# Altium PCB TeenAstro_ZH-1_2022-06-06.pcbdoc (part 1 of 2)
Units mm, origin at the board's own origin, x right, y up, seen from the top; angles counter-clockwise.
Board outline 53 x 62 mm, 4 copper layers (Top Layer, Mid-Layer 1, Mid-Layer 2, Bottom Layer); 108 components, 116 nets, 365 pads, 202 vias.
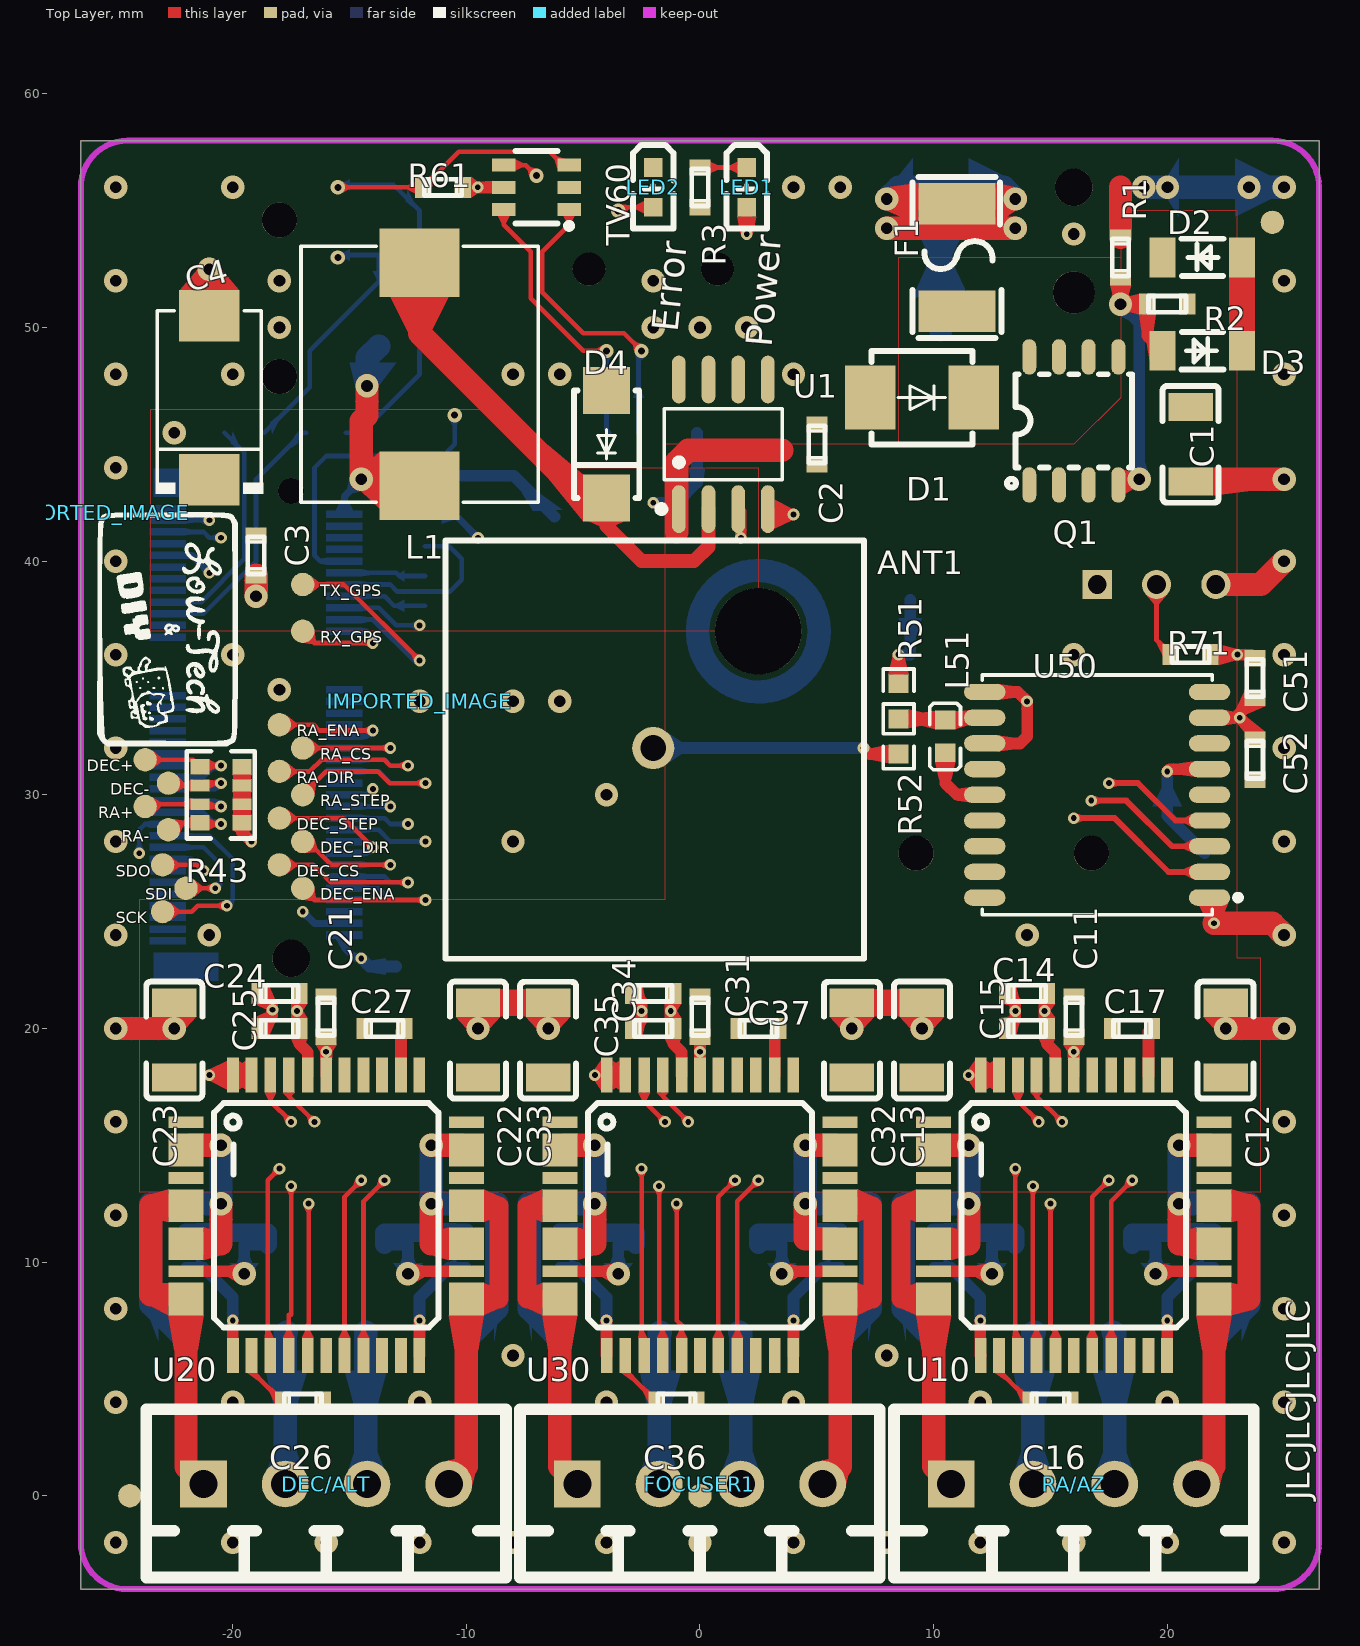
[diagram p0: Top Layer view]
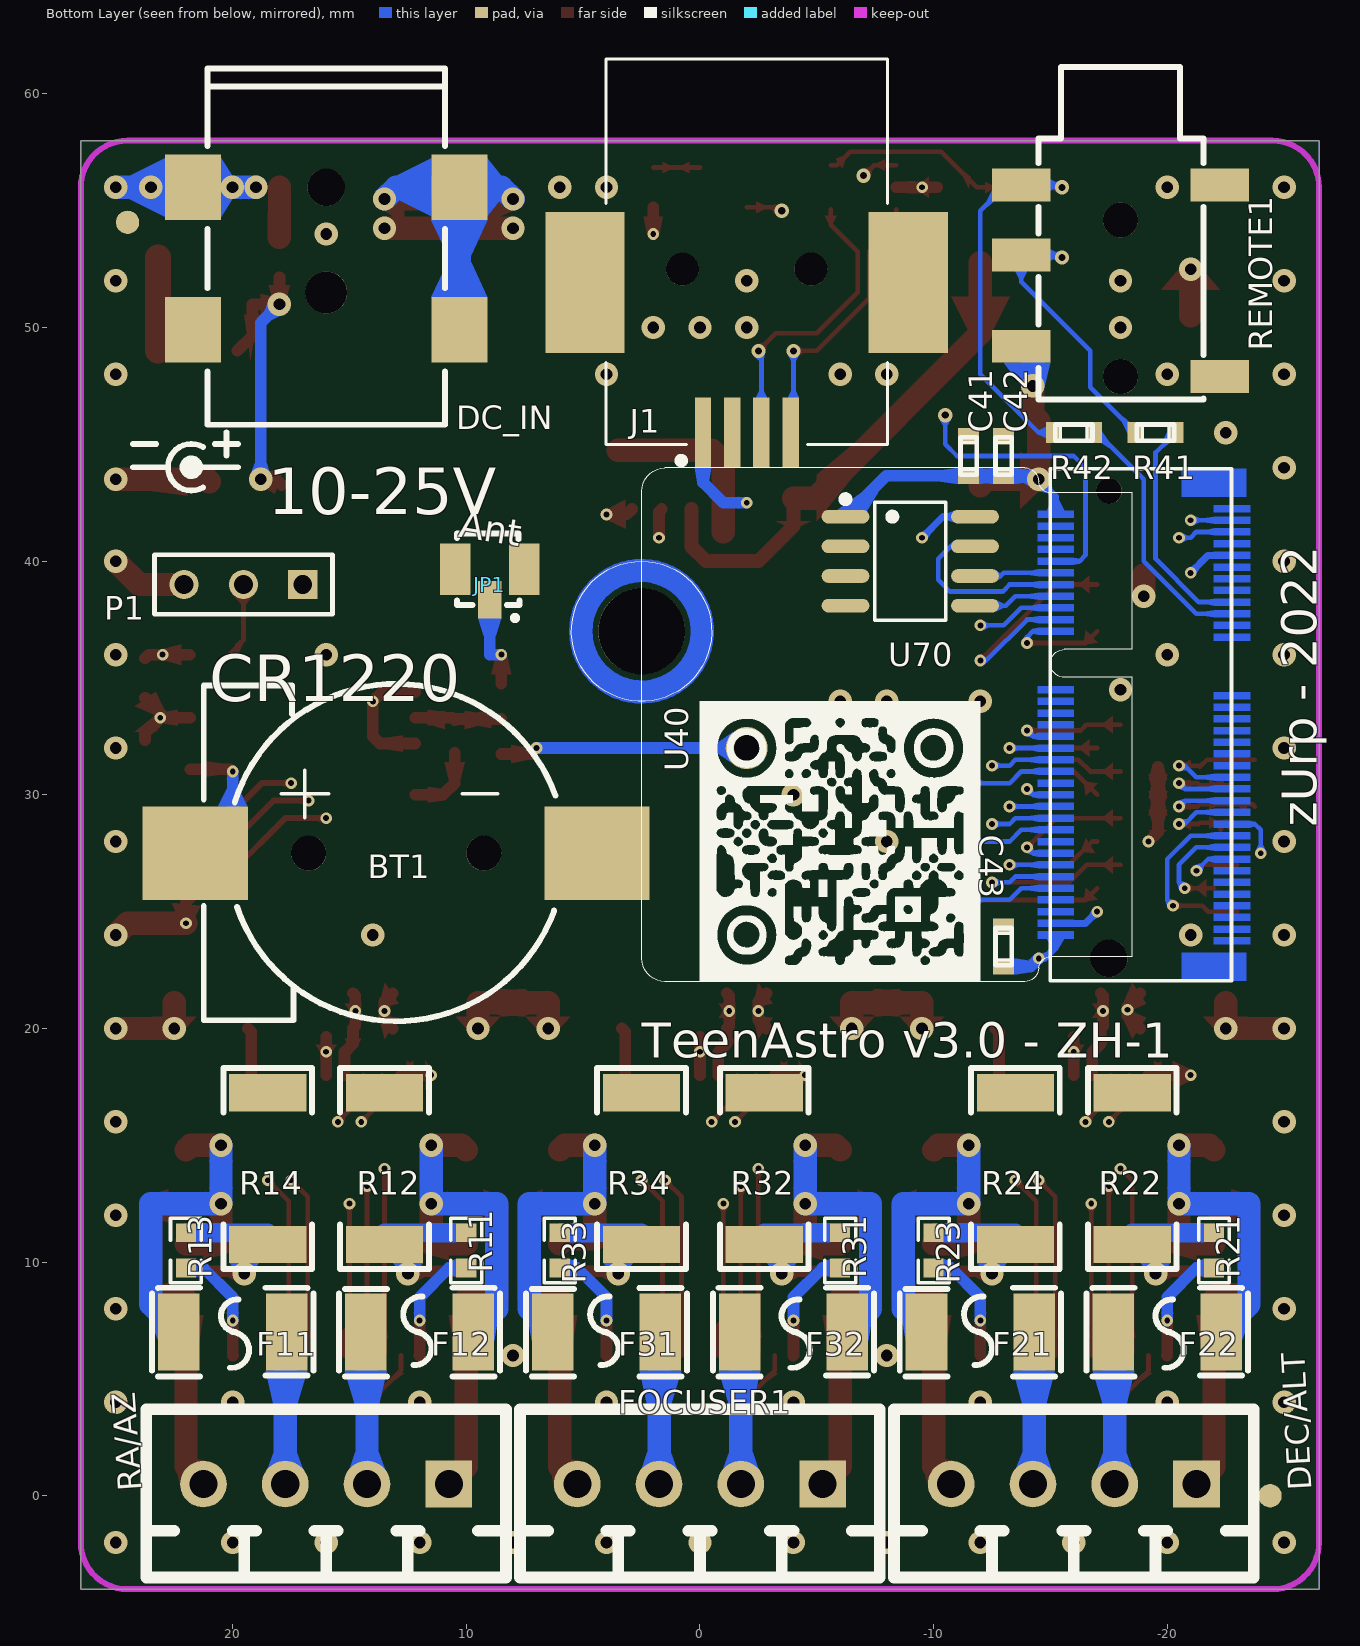
[diagram p1: Bottom Layer view, seen from below]
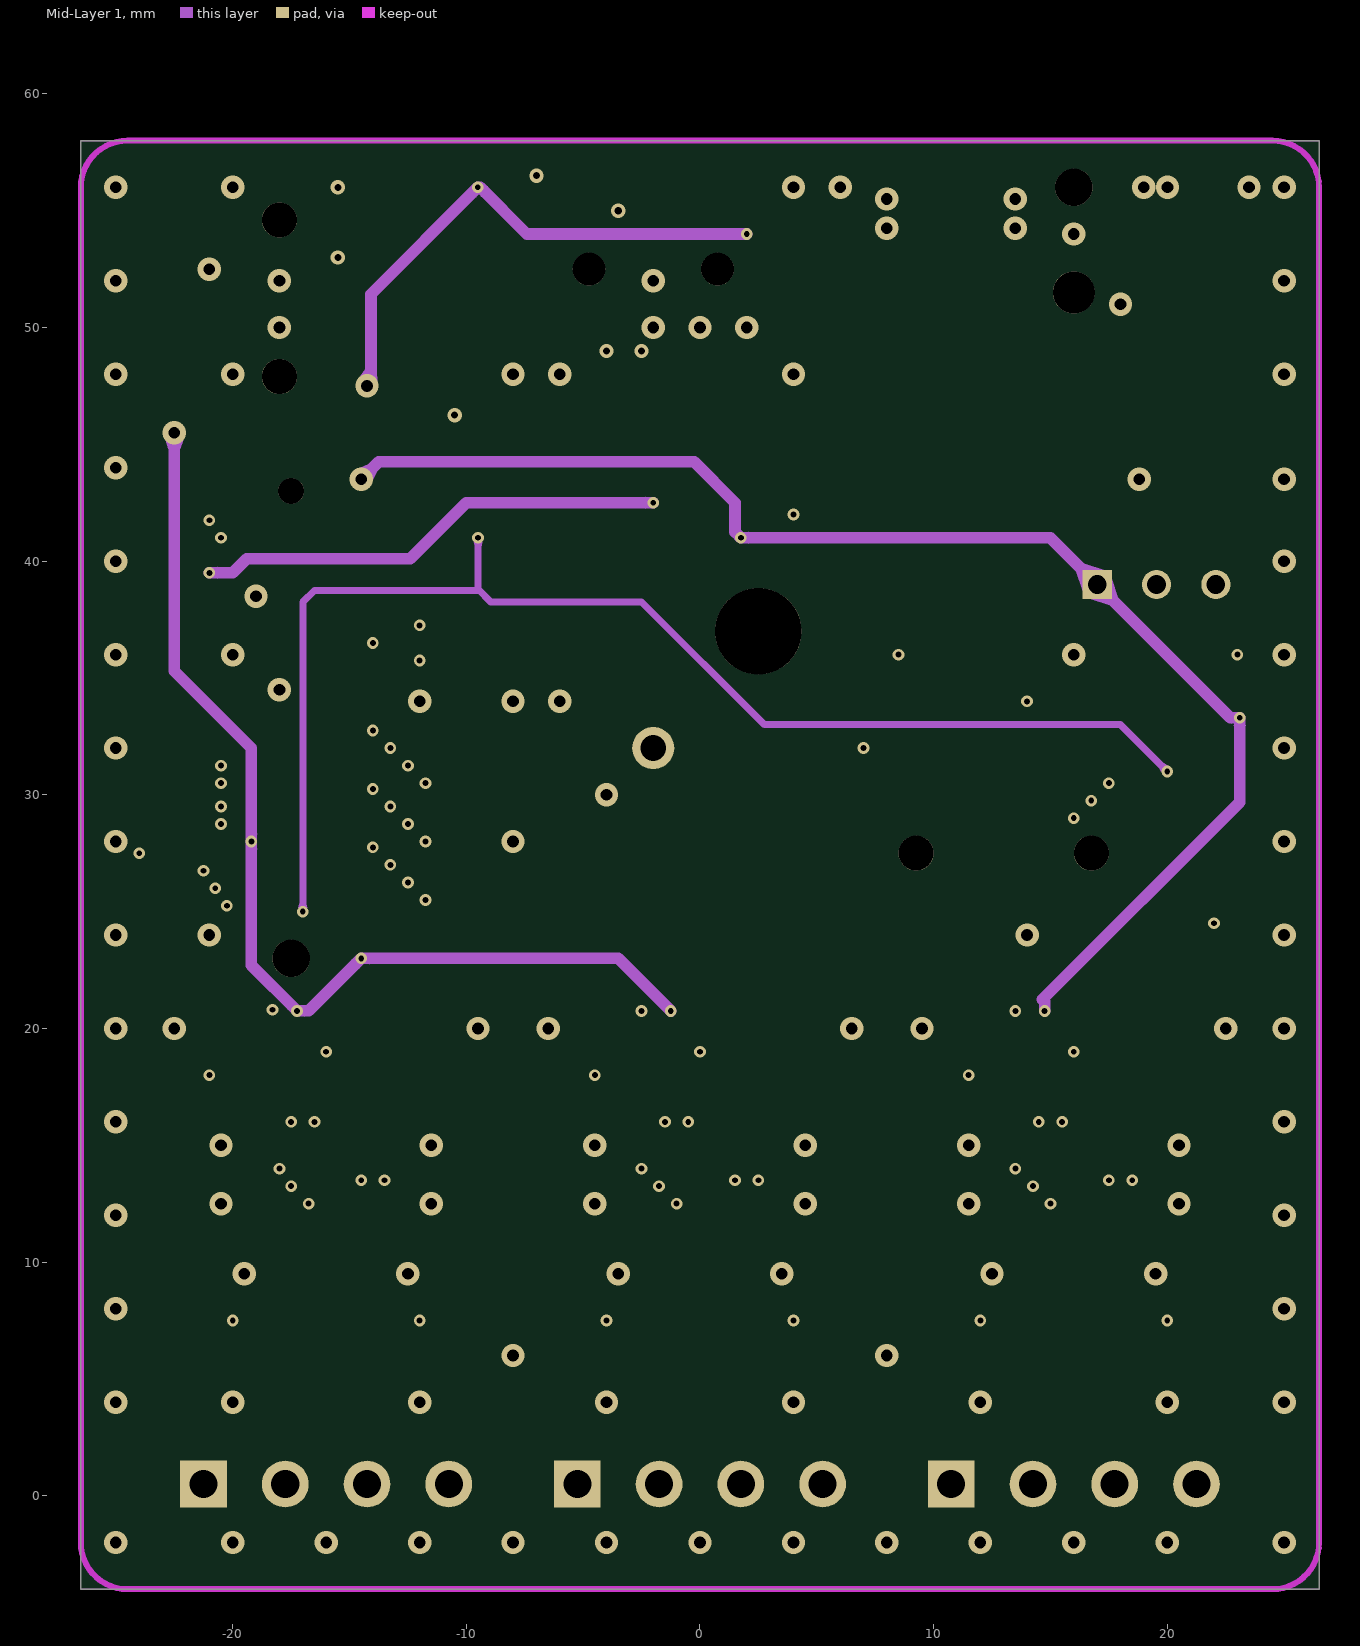
[diagram p2: Mid-Layer 1]
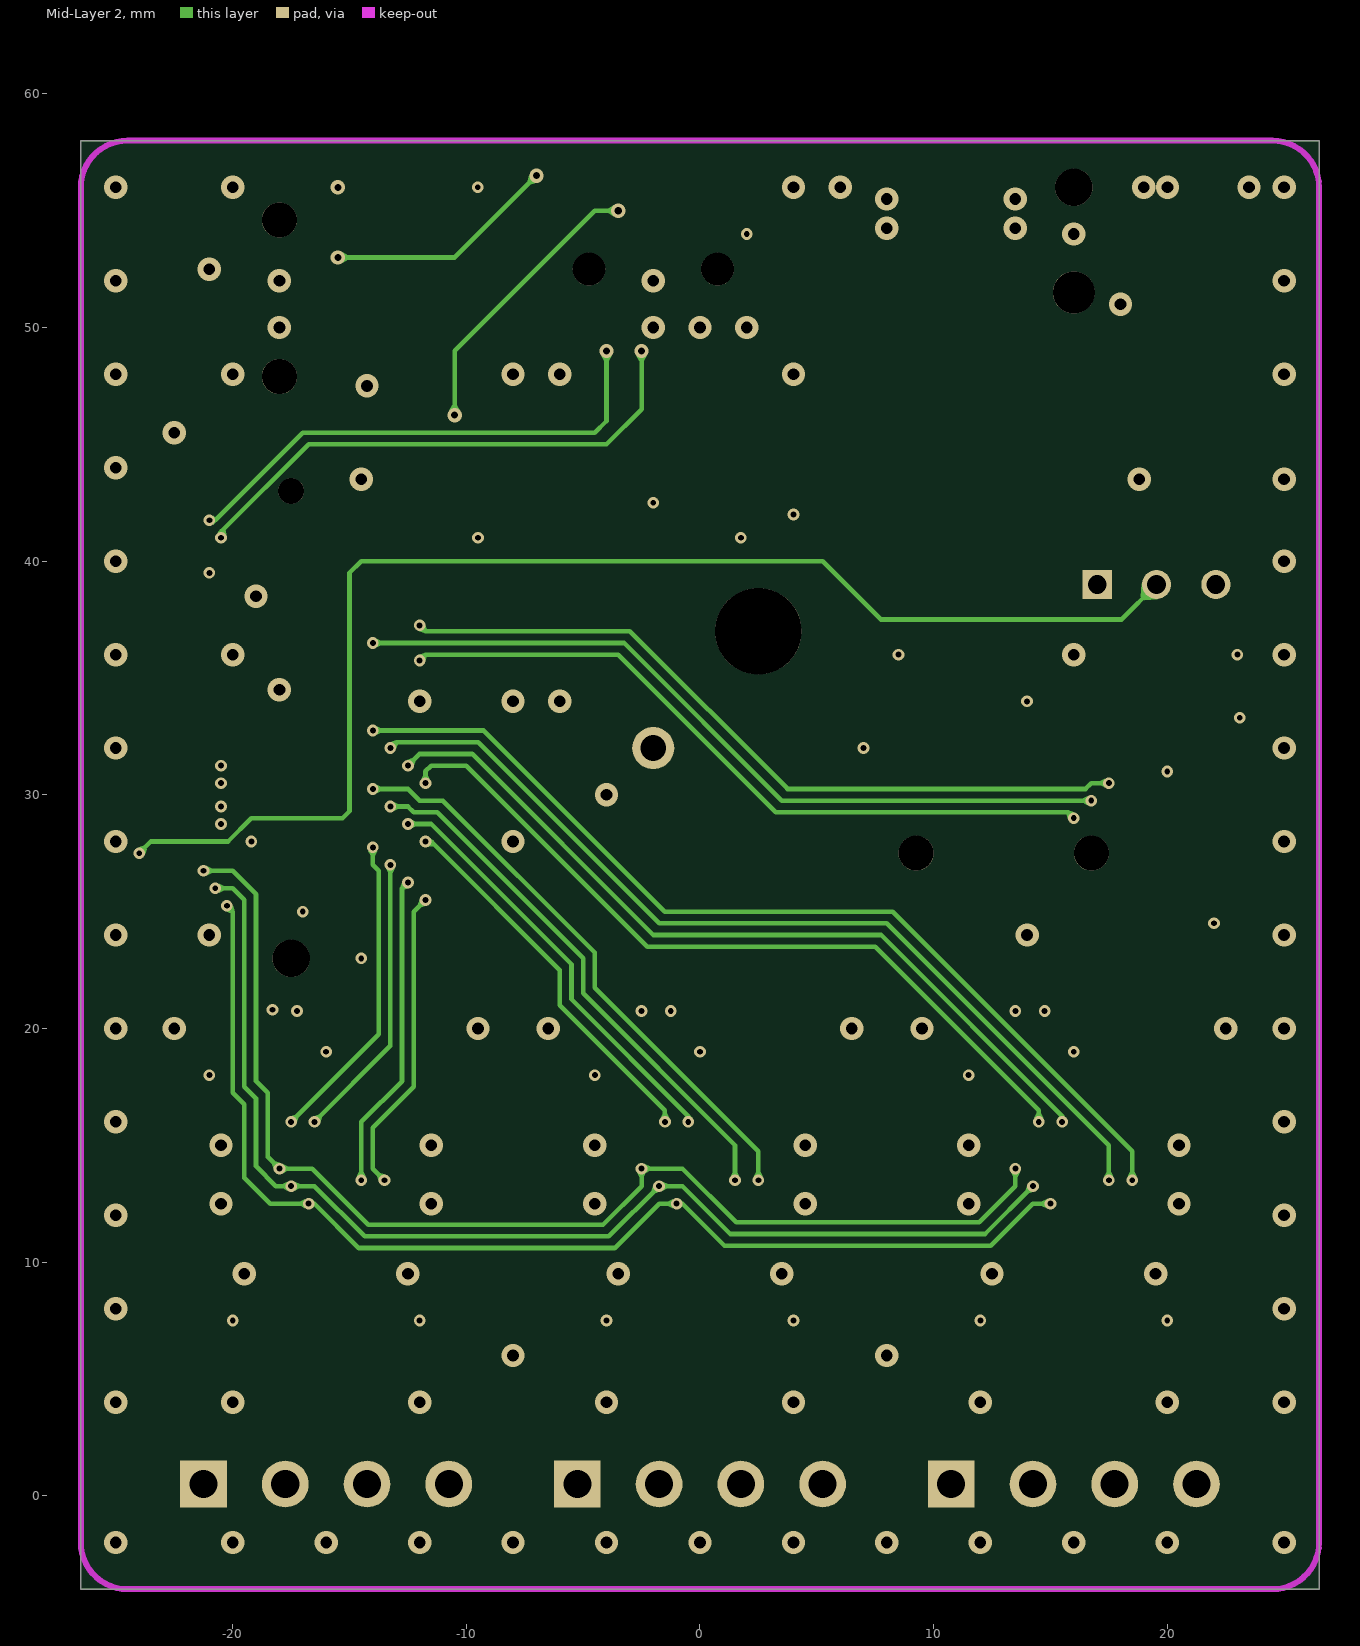
[diagram p3: Mid-Layer 2]

## Layer stack, top to bottom
Top Solder: solder mask 0.0102, Solder Resist, Dk 3.5
Top Layer: signal copper 0.0356
Dielectric1: dielectric 0.32, FR-4, Dk 4.8
Mid-Layer 1: signal copper 0.0356
Dielectric3: dielectric 0.32, FR-4, Dk 4.8
Mid-Layer 2: signal copper 0.0356
Dielectric2: dielectric 0.32, FR-4, Dk 4.8
Bottom Layer: signal copper 0.0356
Bottom Solder: solder mask 0.0102, Solder Resist, Dk 3.5

## Board outline
26.5,-4 -26.5,-4 -26.5,58 26.5,58

## Design rules (kind name [scope] priority, off if disabled: settings)
Clearance [All] p1: gap=0.19 ignorepadtopadclearanceinfootprint=FALSE
ComponentClearance [All] p1 off: gap=0.254 collisioncheckmode=3 verticalgap=0.254 showdistances=FALSE
PolygonConnect [All] p1: connectstyle=Relief reliefconductorwidth=0.254 reliefentries=4 polygonreliefangle="90 Angle" airgapwidth=0.254
RoutingVias [All] p1: holewidth=0.711 width=1.27 viastyle="Through Hole" minholewidth=0.711 minwidth=1.27 maxholewidth=0.711 maxwidth=1.27
SolderMaskExpansion [All] p1: expansion=0.102 istentingtop=FALSE
Width [All] p1: maxlimit=1.2 minlimit=0.2 preferedwidth=0.25
29 further rules are at their usual default settings.

## Components (designator, comment, footprint, x,y, rotation, side; value= is the part's Value field where it differs from the comment)
ANT1 "KH-GPS181804-WY" GPS-ANT-TH_L18.0-W18.0 -2,32 r0 top
BT1 "CR1220" BAT-SMD_CR1220-2ZX 13,27.5 r0 bottom
C1 "10uF 50v" C1206 21.001,45.001 r270 top
C2 "1uF 50V" C_0603#1 4.999,45.001 r90 top
C3 "1uF 50V" C_0603#1 -19,40.25 r270 top
C4 "220uF 10V" CAP-SMD_L7.3-W4.3-R-RD -21,47 r270 top
C11 "100nF 50v" C_0603#1 16,20.5 r270 top
C12 "10uF 50v" C1206 22.5,19.5 r270 top
C13 "10uF 50v" C1206 9.5,19.5 r270 top
C14 "100nF 50v" C_0603#1 14,21.5 r0 top
C15 "1uF 50V" C_0603#1 14,20 r180 top
C16 "470nF 25v" C_0603#1 14.999,4 r180 top
C17 "220nF 25v" C_0603#1 18.5,20 r0 top
C21 "100nF 50v" C_0603#1 -16,20.5 r270 top
C22 "10uF 50v" C1206 -9.5,19.5 r270 top
C23 "10uF 50v" C1206 -22.5,19.5 r270 top
C24 "100nF 50v" C_0603#1 -18,21.5 r0 top
C25 "1uF 50V" C_0603#1 -18,20 r180 top
C26 "470nF 25v" C_0603#1 -17,4 r180 top
C27 "220nF 25v" C_0603#1 -13.5,20 r0 top
C31 "100nF 50v" C_0603#1 0,20.5 r270 top
C32 "10uF 50v" C1206 6.5,19.499 r270 top
C33 "10uF 50v" C1206 -6.5,19.499 r270 top
C34 "100nF 50v" C_0603#1 -2,21.5 r0 top
C35 "1uF 50V" C_0603#1 -2,20 r180 top
C36 "470nF 25v" C_0603#1 -1,4 r180 top
C37 "220nF 25v" C_0603#1 2.5,20 r0 top
C41 "1uF 50V" C_0603#2 -11.5,44.5 r270 bottom
C42 "100nF 50v" C_0603#2 -13,44.5 r90 bottom
C43 "100nF 50v" C_0603#2 -13,23.5 r90 bottom
C51 "1uF 50V" C_0603#1 23.75,35 r90 top
C52 "100nF 50v" C_0603#1 23.75,31.5 r90 top
D1 "P6SMB20A" DO-214AA_L5.6-W4.0-RD 9.5,47 r180 top
D2 "ZMM5V6" LL-34_L3.5-W1.5-RD 21.5,53 r0 top
D3 "ZMM5V6" LL-34_L3.5-W1.5-RD 21.5,49 r180 top
D4 "SS34" DO-214AC_L4.3-W2.7-LS5.3-RD -4,45 r90 top
DC_IN "DC-005" DC-IN-TH_DC-005-5A-2.0-SMT 16,56 r90 bottom
DEC+ "test_point" TEST_POINT -23.75,31.5 r0 top
DEC- "test_point" TEST_POINT -22.75,30.5 r0 top
DEC/ALT "Stepper_motor" STEPPER_MOTOR_VERT -16.001,0.499 r180 top
DEC_CS "test_point" TEST_POINT -18,27 r0 top
DEC_DIR "test_point" TEST_POINT -17,28 r0 top
DEC_ENA "test_point" TEST_POINT -17,26 r0 top
DEC_STEP "test_point" TEST_POINT -18,29 r0 top
F1 "SMD1812P300SLR/24" F1812#1 11,53 r90 top
F11 "SMD1812P300SLR/24" F1812#2 19.999,7 r0 bottom
F12 "SMD1812P300SLR/24" F1812#2 12.001,7 r180 bottom
F21 "SMD1812P300SLR/24" F1812#2 -12,7 r180 bottom
F22 "SMD1812P300SLR/24" F1812#2 -20.001,7 r0 bottom
F31 "SMD1812P300SLR/24" F1812#2 4,6.999 r180 bottom
F32 "SMD1812P300SLR/24" F1812#2 -4,7 r0 bottom
FOCUSER1 "Stepper_motor" STEPPER_MOTOR_VERT 0,0.5 r180 top
IMPORTED_IMAGE "Comment" IMPORTED_IMAGE -12,34 r0 top
IMPORTED_IMAGE "Comment" IMPORTED_IMAGE -25.792,42.081 r0 top
J1 "1-1734346-1" TE_1-1734346-1 -2,52.5 r180 bottom
JP1 "Ant" RF-SMD_734120114 9,39 r180 bottom
L1 "47uH" IND-SMD_L10.8-W10.0_SLO1040H -12,48 r90 top
L51 "47nH" L0603 10.5,32.5 r90 top
LED1 "Power" LED0603-R-RD 2,56 r270 top
LED2 "Error" LED0603-R-RD -2,56 r270 top
P1 "2.54mm 1*3P Header" HDR-TH_43-P2.54-V 17,39 r180 bottom
Q1 "AO4407A" SOIC-8_L4.9-W3.9-P1.27-LS6.0-BL#1 16,46 r0 top
R1 "10K" R_0603#1 18,53 r90 top
R2 "470K" R_0603#1 20,51 r180 top
R3 "10K" R_0603#1 0,55.999 r270 top
R11 "10Ω" R0603#1 10,10.5 r270 bottom
R12 "0.075Ω" R2512 13.5,14 r90 bottom
R13 "10Ω" R0603#1 22,10.5 r270 bottom
R14 "0.075Ω" R2512 18.5,14 r90 bottom
R21 "10Ω" R0603#1 -22,10.5 r270 bottom
R22 "0.075Ω" R2512 -18.5,14 r90 bottom
R23 "10Ω" R0603#1 -10,10.5 r270 bottom
R24 "0.075Ω" R2512 -13.5,14 r90 bottom
R31 "10Ω" R0603#1 -6,10.5 r270 bottom
R32 "0.075Ω" R2512 -2.75,14 r90 bottom
R33 "10Ω" R0603#1 6,10.5 r270 bottom
R34 "0.075Ω" R2512 2.501,14 r90 bottom
R41 "22" R_0603#2 -19.5,45.5 r180 bottom
R42 "22" R_0603#2 -16,45.5 r180 bottom
R43 "4.7kΩ" RES-ARRAY-SMD_0603-8P-L3.2-W1.6-BL -20.5,30 r90 top
R51 "0Ω" R0603#2 8.5,34 r90 top
R52 "0Ω" R0603#2 8.5,32.5 r90 top
R61 "10K" R_0603#1 -11,56 r0 top
R71 "10K" R_0603#1 21,36 r180 top
RA+ "test_point" TEST_POINT -23.75,29.5 r0 top
RA- "test_point" TEST_POINT -22.75,28.5 r0 top
RA/AZ "Stepper_motor" STEPPER_MOTOR_VERT 16.001,0.499 r180 top
RA_CS "test_point" TEST_POINT -17,32 r0 top
RA_DIR "test_point" TEST_POINT -18,31 r0 top
RA_ENA "test_point" TEST_POINT -18,33 r0 top
RA_STEP "test_point" TEST_POINT -17,30 r0 top
REMOTE1 "PJ-327E-SMT" AUDIO-SMD_PJ-327E-SMT -18,52 r180 bottom
RX_GPS "test_point" TEST_POINT -17,37.001 r180 top
SCK "test_point" TEST_POINT -23,25 r90 top
SDI "test_point" TEST_POINT -22,26 r90 top
SDO "test_point" TEST_POINT -23,27 r90 top
TV60 "SRV05-4-P-T7" SOT-23-6_L2.9-W1.6-P0.95-LS2.8-BR -7,56 r0 top
TX_GPS "test_point" TEST_POINT -17,39.001 r180 top
U1 "XL1509-3.3" SOIC-8_L4.9-W3.9-P1.27-LS6.0-BL#2 1.001,45.001 r0 top
U10 "TMC2660-PA" PQFP44_WITH_PADS 16,12.001 r0 top
U20 "TMC2660-PA" PQFP44_WITH_PADS -15.999,12.001 r0 top
U30 "TMC2660-PA" PQFP44_WITH_PADS 0,12.001 r0 top
U40 "MICROMOD-Teensy4" M.2-CONNECTOR-E -17.5,32.999 r270 bottom
U50 "ATGM336H-5N31" GPSM-SMD_ATGM336H-TR 17,30 r270 top
U70 "DS1302ZN+" SOIC-8_L4.9-W3.9-P1.27-LS6.0-BL#3 -9,40 r90 bottom
? "" ? 0,-6.978 r0 top
? "" ? 0,-8.27 r0 top
? "" ? 29.201,27 r0 top

## Footprints (in the part's own frame and the unit in brackets; to place one, negate y for a bottom-side part, rotate by r counter-clockwise, add the part's x,y. Pads: shape width x height; smd on the part's side, far side on the other; paste and mask are expansions set on the pad)
AUDIO-SMD_PJ-327E-SMT [mm]
  rect 2.5x1.4 smd: 1(4.25,-4.1) 2(-4.25,4.1) 3(-4.25,1.1) 4(-4.25,-2.8) 5(4.25,4.1)
  round 1.5 hole 1.5 unplated: ""(0,-4.1) ""(0,2.6)
  silkscreen extent -3.51,-5.08 3.56,9.14
BAT-SMD_CR1220-2ZX [mm]
  rect 4.5x4 smd: 1(8.6,0) 2(-8.6,0)
  round 1.5 hole 1.5 unplated: ""(-3.75,0) ""(3.75,0)
  silkscreen extent -6.81,-7.24 8.24,7.19
C1206 [mm]
  rect 1.2x1.9 smd: 1(-1.6,0) 2(1.6,0)
  silkscreen extent -2.5,-1.2 2.5,1.2
C_0603#1 [mm]
  rect 0.7x0.9 smd: 1(0.85,0) 2(-0.85,0)
  silkscreen extent -0.8,-0.38 0.8,0.38
C_0603#2 [mm]
  rect 0.7x0.9 smd: 1(-0.85,0) 2(0.85,0)
  silkscreen extent -0.8,-0.38 0.8,0.38
CAP-SMD_L7.3-W4.3-R-RD [mm]
  rect 2.207x2.592 smd: 1(3.511,0) 2(-3.511,0)
  silkscreen extent -3.73,-2.3 4.11,2.3
DC-IN-TH_DC-005-5A-2.0-SMT [mm]
  rect 2.8x2.4 smd: 1(-6.1,-5.7) 1(0,-5.7) 2(0,5.7) 3(-6.1,5.7)
  round 1.8 hole 1.8 unplated: ""(-4.5,0)
  round 1.6 hole 1.6 unplated: ""(0,0)
  silkscreen extent -10.16,-5.08 5.08,5.08
DO-214AA_L5.6-W4.0-RD [mil]
  rect 85x108 smd: 1(-87,0) 2(87,0)
  silkscreen extent -85,-79 85,79
DO-214AC_L4.3-W2.7-LS5.3-RD [mm]
  rect 2x2 smd: 1(-2.3,0) 2(2.3,0)
  silkscreen extent -2.3,-1.4 2.3,1.4
F1812#1 [mm]
  rect 1.78x3.3 smd: 1(-2.305,0) 2(2.305,0)
  silkscreen extent -3.45,-1.9 3.45,1.9
F1812#2 [mm]
  rect 1.78x3.3 smd: 1(2.305,0) 2(-2.305,0)
  silkscreen extent -3.45,-1.9 3.45,1.9
GPS-ANT-TH_L18.0-W18.0 [mm]
  round 1.8 hole 1.1: 1(0,0)
  silkscreen extent -8.89,-9.02 9.02,8.89
GPSM-SMD_ATGM336H-TR [mm]
  oval 0.7x1.773 smd: 1(4.4,4.811) 2(3.3,4.811) 3(2.2,4.811) 4(1.1,4.811) 5(0,4.811) 6(-1.1,4.811) 7(-2.2,4.811) 8(-3.3,4.811) 9(-4.4,4.811) 10(-4.4,-4.811) 11(-3.3,-4.811) 12(-2.2,-4.811) 13(-1.1,-4.811) 14(0,-4.811) 15(1.1,-4.811) 16(2.2,-4.811) 17(3.3,-4.811) 18(4.4,-4.811)
  silkscreen extent -5.13,-4.93 5.13,6.15
HDR-TH_43-P2.54-V [mm]
  rect 1.25x1.25 hole 0.8: 1(0,0)
  round 1.25 hole 0.8: 2(-2.54,0) 3(-5.08,0)
  silkscreen extent -6.35,-1.27 1.27,1.27
IMPORTED_IMAGE [mm]
IND-SMD_L10.8-W10.0_SLO1040H [mm]
  rect 2.924x3.42 smd: 1(4.778,0) 2(-4.778,0)
  silkscreen extent -5.48,-5.08 5.48,5.08
L0603 [mm]
  rect 0.8x0.864 smd: 1(-0.7,0) 2(0.7,0)
  silkscreen extent -1.42,-0.65 1.41,0.67
LED0603-R-RD [mm]
  rect 0.8x0.8 smd: 1(0.851,0) 2(-0.851,0)
  silkscreen extent -1.82,-0.86 1.77,0.86
LL-34_L3.5-W1.5-RD [mm]
  rect 1.1x1.7 smd: 1(-1.7,0) 2(1.7,0)
  silkscreen extent -0.9,-0.8 0.9,0.8
M.2-CONNECTOR-E [mm]
  round 1.1 hole 1.1 unplated: ""(-10,0)
  round 3.7 hole 3.7 unplated: ""(-4,-20)
  round 1.6 hole 1.6 unplated: ""(10,0)
  Top Layer circle w1: c-4,-20 r2.6
  Top Layer region: 9.1,6.05 9.4,6.05 9.4,4.5 9.1,4.5
  Top Layer region: -9.4,6.05 -9.1,6.05 -9.1,4.5 -9.4,4.5
  Top Layer region: -10.95,5.875 -9.75,5.875 -9.75,3.125 -10.95,3.125
  Top Layer region: 9.75,5.875 10.95,5.875 10.95,3.125 9.75,3.125
  Top Layer region: -9.15,-1.5 -8.85,-1.5 -8.85,-3.05 -9.15,-3.05
  Top Layer region: -8.9,6.05 -8.6,6.05 -8.6,4.5 -8.9,4.5
  Top Layer region: -8.65,-1.5 -8.35,-1.5 -8.35,-3.05 -8.65,-3.05
  Top Layer region: -8.4,6.05 -8.1,6.05 -8.1,4.5 -8.4,4.5
  Top Layer region: -8.15,-1.5 -7.85,-1.5 -7.85,-3.05 -8.15,-3.05
  Top Layer region: -7.9,6.05 -7.6,6.05 -7.6,4.5 -7.9,4.5
  Top Layer region: -7.65,-1.5 -7.35,-1.5 -7.35,-3.05 -7.65,-3.05
  Top Layer region: -7.4,6.05 -7.1,6.05 -7.1,4.5 -7.4,4.5
  Top Layer region: -7.15,-1.5 -6.85,-1.5 -6.85,-3.05 -7.15,-3.05
  Top Layer region: -6.9,6.05 -6.6,6.05 -6.6,4.5 -6.9,4.5
  Top Layer region: -6.65,-1.5 -6.35,-1.5 -6.35,-3.05 -6.65,-3.05
  Top Layer region: -6.4,6.05 -6.1,6.05 -6.1,4.5 -6.4,4.5
  Top Layer region: -6.15,-1.5 -5.85,-1.5 -5.85,-3.05 -6.15,-3.05
  Top Layer region: -5.9,6.05 -5.6,6.05 -5.6,4.5 -5.9,4.5
  Top Layer region: -5.65,-1.5 -5.35,-1.5 -5.35,-3.05 -5.65,-3.05
  Top Layer region: -5.4,6.05 -5.1,6.05 -5.1,4.5 -5.4,4.5
  Top Layer region: -5.15,-1.5 -4.85,-1.5 -4.85,-3.05 -5.15,-3.05
  Top Layer region: -4.9,6.05 -4.6,6.05 -4.6,4.5 -4.9,4.5
  Top Layer region: -4.65,-1.5 -4.35,-1.5 -4.35,-3.05 -4.65,-3.05
  Top Layer region: -4.4,6.05 -4.1,6.05 -4.1,4.5 -4.4,4.5
  Top Layer region: -4.15,-1.5 -3.85,-1.5 -3.85,-3.05 -4.15,-3.05
  Top Layer region: -3.9,6.05 -3.6,6.05 -3.6,4.5 -3.9,4.5
  Top Layer region: -1.65,-1.5 -1.35,-1.5 -1.35,-3.05 -1.65,-3.05
  Top Layer region: -1.4,6.05 -1.1,6.05 -1.1,4.5 -1.4,4.5
  Top Layer region: -1.15,-1.5 -0.85,-1.5 -0.85,-3.05 -1.15,-3.05
  Top Layer region: -0.9,6.05 -0.6,6.05 -0.6,4.5 -0.9,4.5
  Top Layer region: -0.65,-1.5 -0.35,-1.5 -0.35,-3.05 -0.65,-3.05
  Top Layer region: -0.4,6.05 -0.1,6.05 -0.1,4.5 -0.4,4.5
  Top Layer region: -0.15,-1.5 0.15,-1.5 0.15,-3.05 -0.15,-3.05
  Top Layer region: 0.1,6.05 0.4,6.05 0.4,4.5 0.1,4.5
  Top Layer region: 0.35,-1.5 0.65,-1.5 0.65,-3.05 0.35,-3.05
  Top Layer region: 0.6,6.05 0.9,6.05 0.9,4.5 0.6,4.5
  Top Layer region: 0.85,-1.5 1.15,-1.5 1.15,-3.05 0.85,-3.05
  Top Layer region: 1.1,6.05 1.4,6.05 1.4,4.5 1.1,4.5
  Top Layer region: 1.35,-1.5 1.65,-1.5 1.65,-3.05 1.35,-3.05
  Top Layer region: 1.6,6.05 1.9,6.05 1.9,4.5 1.6,4.5
  Top Layer region: 1.85,-1.5 2.15,-1.5 2.15,-3.05 1.85,-3.05
  Top Layer region: 2.1,6.05 2.4,6.05 2.4,4.5 2.1,4.5
  Top Layer region: 2.35,-1.5 2.65,-1.5 2.65,-3.05 2.35,-3.05
  Top Layer region: 2.6,6.05 2.9,6.05 2.9,4.5 2.6,4.5
  Top Layer region: 2.85,-1.5 3.15,-1.5 3.15,-3.05 2.85,-3.05
  Top Layer region: 3.1,6.05 3.4,6.05 3.4,4.5 3.1,4.5
  Top Layer region: 3.35,-1.5 3.65,-1.5 3.65,-3.05 3.35,-3.05
  Top Layer region: 3.6,6.05 3.9,6.05 3.9,4.5 3.6,4.5
  Top Layer region: 3.85,-1.5 4.15,-1.5 4.15,-3.05 3.85,-3.05
  Top Layer region: 4.1,6.05 4.4,6.05 4.4,4.5 4.1,4.5
  Top Layer region: 4.35,-1.5 4.65,-1.5 4.65,-3.05 4.35,-3.05
  Top Layer region: 4.6,6.05 4.9,6.05 4.9,4.5 4.6,4.5
  Top Layer region: 4.85,-1.5 5.15,-1.5 5.15,-3.05 4.85,-3.05
  Top Layer region: 5.1,6.05 5.4,6.05 5.4,4.5 5.1,4.5
  Top Layer region: 5.35,-1.5 5.65,-1.5 5.65,-3.05 5.35,-3.05
  Top Layer region: 5.6,6.05 5.9,6.05 5.9,4.5 5.6,4.5
  Top Layer region: 5.85,-1.5 6.15,-1.5 6.15,-3.05 5.85,-3.05
  Top Layer region: 6.1,6.05 6.4,6.05 6.4,4.5 6.1,4.5
  Top Layer region: 6.35,-1.5 6.65,-1.5 6.65,-3.05 6.35,-3.05
  Top Layer region: 6.6,6.05 6.9,6.05 6.9,4.5 6.6,4.5
  Top Layer region: 6.85,-1.5 7.15,-1.5 7.15,-3.05 6.85,-3.05
  Top Layer region: 7.1,6.05 7.4,6.05 7.4,4.5 7.1,4.5
  Top Layer region: 7.35,-1.5 7.65,-1.5 7.65,-3.05 7.35,-3.05
  Top Layer region: 7.6,6.05 7.9,6.05 7.9,4.5 7.6,4.5
  Top Layer region: 7.85,-1.5 8.15,-1.5 8.15,-3.05 7.85,-3.05
  Top Layer region: 8.1,6.05 8.4,6.05 8.4,4.5 8.1,4.5
  Top Layer region: 8.35,-1.5 8.65,-1.5 8.65,-3.05 8.35,-3.05
  Top Layer region: 8.6,6.05 8.9,6.05 8.9,4.5 8.6,4.5
  Top Layer region: 8.85,-1.5 9.15,-1.5 9.15,-3.05 8.85,-3.05
  silkscreen extent -11,-23 11,5.25
PQFP44_WITH_PADS [mm]
  rect 1.5x0.5 smd: 1(-6,3.988) 4(-6,1.6) 9(-6,-2.387) 25(6,-2.387) 30(6,1.6) 33(6,3.988)
  rect 1.5x1.4 smd: 2(-6,-1.219) 2(-6,2.794) 5(-6,-3.581) 5(-6,0.406) 23(6,-3.581) 23(6,0.406) 26(6,-1.219) 26(6,2.794)
  rect 0.5x1.5 smd: 12(-3.988,-6) 13(-3.2,-6) 14(-2.387,-6) 15(-1.6,-6) 16(-0.787,-6) 17(0,-6) 18(0.788,-6) 19(1.6,-6) 20(2.388,-6) 21(3.201,-6) 22(3.988,-6) 34(3.988,6) 35(3.201,6) 36(2.388,6) 37(1.6,6) 38(0.788,6) 39(0,6) 40(-0.787,6) 41(-1.6,6) 42(-2.387,6) 43(-3.2,6) 44(-3.988,6)
  silkscreen extent -4.8,-4.8 4.8,4.8
R0603#1 [mm]
  rect 0.806x0.864 smd: 1(0.753,0) 2(-0.753,0)
  silkscreen extent -1.39,-0.66 1.39,0.66
R0603#2 [mm]
  rect 0.806x0.864 smd: 1(-0.753,0) 2(0.753,0)
  silkscreen extent -1.39,-0.66 1.39,0.66
R2512 [mm]
  rect 1.6x3.3 smd: 1(3.25,0) 2(-3.25,0)
  silkscreen extent -4.3,-1.9 4.3,1.9
R_0603#1 [mm]
  rect 0.7x0.9 smd: 1(0.85,0) 2(-0.85,0)
  silkscreen extent -0.8,-0.38 0.8,0.38
R_0603#2 [mm]
  rect 0.7x0.9 smd: 1(-0.85,0) 2(0.85,0)
  silkscreen extent -0.8,-0.38 0.8,0.38
RES-ARRAY-SMD_0603-8P-L3.2-W1.6-BL [mm]
  rect 0.65x0.8 smd: 1(-1.2,-0.9) 4(1.2,-0.9) 5(1.2,0.9) 8(-1.2,0.9)
  rect 0.5x0.8 smd: 2(-0.4,-0.9) 3(0.4,-0.9) 6(0.4,0.9) 7(-0.4,0.9)
  silkscreen extent -1.87,-1.45 1.87,1.47
RF-SMD_734120114 [mm]
  rect 1x1.6 smd: 1(0,-0.653)
  rect 1.3x2.2 smd: 2(1.475,0.653) 3(-1.475,0.653)
  silkscreen extent -1.4,-1.52 1.27,2.18
SOIC-8_L4.9-W3.9-P1.27-LS6.0-BL#1 [mm]
  oval 0.6x1.52 smd: 1(-1.905,-2.74) 2(-0.635,-2.74) 3(0.635,-2.74) 4(1.905,-2.74) 5(1.905,2.74) 6(0.635,2.74) 7(-0.635,2.74) 8(-1.905,2.74)
  silkscreen extent -2.86,-2.86 2.5,2
SOIC-8_L4.9-W3.9-P1.27-LS6.0-BL#2 [mm]
  oval 0.588x2.045 smd: 1(-1.905,-2.773) 2(-0.635,-2.773) 3(0.635,-2.773) 4(1.905,-2.773) 5(1.905,2.773) 6(0.635,2.773) 7(-0.635,2.773) 8(-1.905,2.773)
  silkscreen extent -2.8,-2.92 2.53,1.52
SOIC-8_L4.9-W3.9-P1.27-LS6.0-BL#3 [mm]
  oval 0.588x2.045 smd: 1(1.905,2.773) 2(0.635,2.773) 3(-0.635,2.773) 4(-1.905,2.773) 5(-1.905,-2.773) 6(-0.635,-2.773) 7(0.635,-2.773) 8(1.905,-2.773)
  silkscreen extent -2.53,-1.52 2.8,2.92
SOT-23-6_L2.9-W1.6-P0.95-LS2.8-BR [mm]
  rect 1x0.55 smd: 1(1.4,-0.95) 2(1.4,0) 3(1.4,0.95) 4(-1.4,0.95) 5(-1.4,0) 6(-1.4,-0.95)
  silkscreen extent -0.9,-1.78 1.52,1.55
STEPPER_MOTOR_VERT [mm]
  rect 2x2 hole 1.2: 1(5.25,0)
  round 2 hole 1.2: 2(1.75,0) 3(-1.75,0) 4(-5.25,0)
  silkscreen extent -7.7,-3.2 7.7,4
TE_1-1734346-1 [mm]
  rect 0.7x3 smd: 1(-1.87,-7) 2(0.63,-7) 3(1.88,-7) 4(-0.62,-7)
  rect 3.4x6.04 smd: SH1(-6.92,-0.58) SH2(6.92,-0.58)
  round 1.4 hole 1.4 unplated: ""(-2.75,0) ""(2.75,0)
  silkscreen extent -6.02,-8.34 6.02,9
TEST_POINT [mm]
  round 1 smd: 1(0,0)
? [mm]

## Free pads (board coordinates)
  round 1 smd far side: 1(-24.4,0) 1(24.5,54.5)
  round 1 smd: 1(-24.4,0) 1(0,0) 1(24.5,54.5)

## Via types
v1: diameter 1, hole 0.5, Top Layer to Bottom Layer, 111 vias
v2: diameter 0.5, hole 0.25, Top Layer to Bottom Layer, 84 vias
v3: diameter 0.61, hole 0.305, Top Layer to Bottom Layer, 7 vias

## Nets (pads, with @x,y where several pads share a name; then routed paths per layer and width w, separated by ;. In a path a pad name is that pad's centre, name@x,y a point inside that pad or via, vN(x,y) a via of type N, cw(c..) or ccw(c..) an arc to the next point about the centre after c; other vN are vias at no path point)
+3.3V: C3.2 C4.1 C14.1 C15.2 C24.1 C25.2 C34.1 C35.2 C41.2 C42.1 C43.1 C51.2 C52.1 L1.2 LED1.1 P1.1 R43.1 R43.2 R43.3 R43.4 R61.1 REMOTE1.4 TV60.5 U1.3 U10.40 U20.40 U30.40 U50.8 U70.1 | length 171.7
  Top Layer w0.5: R43.4@-19.6,31.2 R43.1@-19.6,28.8 -19.601,28.399 v2@-19.199,28.001 ; C24.1@-17.15,21.5 -17.249,21.399 -17.249,20.751 -17.249,20.101 C25.2@-17.15,20 -17.15,19.349 -16.786,18.986 U20.40@-16.786,18.001 ; R61.1@-10.149,55.999 -9.509,55.999 TV60.5@-8.399,55.999 ; C34.1@-1.15,21.5 -1.249,21.399 -1.249,20.751 -1.249,20.101 C35.2@-1.15,20 -1.15,19.349 -0.787,18.986 U30.40@-0.786,18.001 ; U1.3@1.636,42.228 1.751,42.115 v2(1.75,41) ; v2(2,54) LED1.1@1.999,55.148 ; C14.1@14.85,21.5 14.75,21.399 v2(14.75,20.75) 14.75,20.101 C15.2@14.85,20 14.849,19.352 15.213,18.989 U10.40@15.213,18.001 ; U50.8@21.811,33.299 22.901,33.299 C51.2@23.75,34.15 ; v2@23.099,33.299 23.749,32.651 C52.1@23.749,32.349
  Top Layer w1: v1@-14.249,47.5 -14.249,46.25 -14.5,45.999 v1(-14.5,43.5) -12.278,43.5 L1.2@-12,43.222
  Mid-Layer 1 w0.5: v1@-22.499,45.501 -22.499,35.301 -19.199,32.001 -19.199,28.001 -19.199,22.7 -17.249,20.751 -16.751,20.751 v2@-14.5,22.999 ; v1(-14.5,43.5) -13.751,44.249 -0.251,44.249 1.499,42.499 1.499,41.249 v2(1.75,41) 14.999,41 17.001,38.999 22.7,33.299 23.099,33.299 23.099,29.682 14.659,21.242 14.75,21.15 v2(14.75,20.75) ; v2(-14.5,23) -3.5,23 v2(-1.25,20.75) ; v1(-14.25,47.5) -14.082,47.668 -14.082,51.428 v2(-9.51,56) -9.402,56 -7.402,54 v2(2,54)
  Bottom Layer w0.3: -15.224,24 -15.224,23.474 -14.749,22.999 v2@-14.5,22.999 ; -15.224,42.001 -15.224,42.776 v1(-14.5,43.5)
  Bottom Layer w0.5: v2@-14.5,22.999 -14.15,22.651 C43.1@-12.999,22.651 ; v1(-14.5,43.5) -14.351,43.649 -12.999,43.649 C41.2@-11.5,43.65 -7.973,43.649 U70.1@-6.227,41.905
  Bottom Layer w1: v1@-14.249,47.5 -14.249,48.699 REMOTE1.4@-13.749,49.199
  other v1: -22.5,45.5
  other v2: -17.25,20.75 -19.2,28 23.1,33.3
C36_1: C36.1 U30.13 | length 2.6
  Top Layer w0.2: U30.13@-3.199,6.001 -3.2,5.349 C36.1@-1.85,4
C37_1: C37.1 U30.35 | length 2.1
  Top Layer w0.5: U30.35@3.202,18.001 3.201,19.852 C37.1@3.351,20
CE: U70.5 | length 3.6
  Bottom Layer w0.2: -15.224,38.501 -13.5,38.501 -13.096,38.095 U70.5@-11.772,38.095
D3_1: D2.2 D3.1 | length 4
  Top Layer w1.1: D3.1@23.201,49.001 D2.2@23.201,52.999
D3_2: D3.2 Q1.4 R1.2 R2.1 | length 13.4
  Top Layer w0.5: Q1.4@17.905,43.26 18.146,43.5 v1(18.8,43.5) ; R1.2@18.001,52.151 R1.2@18,52.15 v1(18,51) R2.1@19.15,51 19.15,49.652 D3.2@19.8,49
  Bottom Layer w0.5: v1(18,51) 18.8,50.2 v1(18.8,43.5)
D4_1: D4.1 L1.1 U1.2 | length 22
  Top Layer w0.6: D4.1@-4,42.7 -4,41.501 -2.499,40 -0.251,40 0.366,40.617 U1.2@0.366,42.228
  Top Layer w1: L1.1@-12,52.778 -12.001,49.751 -4.95,42.7 D4.1@-4,42.7
D+: J1.3 TV60.6 | length 35.5
  Top Layer w0.2: TV60.6@-8.399,55.052 -8.399,54.399 -7.249,53.251 -7.249,51.249 -5.001,49.001 v3(-4,49)
  Mid-Layer 2 w0.2: v2(-21,41.75) -20.749,41.75 -16.997,45.501 -4.5,45.501 -4,45.999 v3(-4,49)
  Bottom Layer w0.2: -22.776,41.75 v2(-21,41.75) ; v3(-4,49) -4,45.621 J1.3@-3.88,45.5
D-: J1.2 TV60.1 | length 38.2
  Top Layer w0.2: TV60.1@-5.6,55.05 -5.6,54.401 -6.751,53.251 -6.751,51.501 -5.001,49.751 -3.251,49.751 v3@-2.499,49.001
  Mid-Layer 2 w0.2: v2(-20.5,41) -20.5,41.249 -16.751,45.001 -4,45.001 -2.499,46.499 v3@-2.499,49.001
  Bottom Layer w0.2: -22.776,41.249 -21.249,41.249 -21,41 v2(-20.5,41) ; J1.2@-2.63,45.5 -2.631,48.869 v3@-2.499,49.001
  other v3: -2.5,49
DC_IN_1: DC_IN.1 F1.2 | length 23.2
  Top Layer w1: v1(8,55.5) 10.803,55.501 F1.2@11,55.305 11.194,55.501 v1@13.501,55.501 ; v1(8,54.25) v1(13.5,54.25)
  Bottom Layer w1: v1(8,55.5) 8.502,56.002 DC_IN.1@10.3,56.002 ; DC_IN.1@10.3,49.9 DC_IN.1@10.3,56.002 ; v1@13.501,55.501 13,56.002 DC_IN.1@10.3,56.002
  other v1: 13.5,55.5
DEC_BMA1: F22.2 U20.2 | length 16.3
  Top Layer w1: U20.2@-21.998,10.782 -20.5,10.782 v1(-20.5,12.5) ; U20.2@-21.998,14.795 -21.793,15.001 v1(-20.5,15)
  Bottom Layer w1: F22.2@-22.306,7 -23.5,8.194 -23.5,12.501 v1(-20.5,12.5) ; v1(-20.5,12.5) v1(-20.5,15)
DEC_BMA2: DEC/ALT.1 U20.5 | length 15.1
  Top Layer w1: U20.5@-21.998,12.407 -23.5,12.407 -23.5,8.6 -22.179,8.6 -21.998,8.42 -21.998,1.247 DEC/ALT.1@-21.251,0.499
DEC_BMB1: F21.2 U20.26 | length 16
  Top Layer w1: v1(-11.5,12.5) -11.501,10.782 U20.26@-9.999,10.782 ; v1(-11.5,15) -10.205,15.001 U20.26@-9.999,14.795
  Bottom Layer w1: v1(-11.5,12.5) -8.699,12.501 -8.699,7.996 F21.2@-9.695,7 ; v1(-11.5,12.5) v1(-11.5,15)
DEC_BMB2: DEC/ALT.4 U20.23 | length 15
  Top Layer w0.8: U20.23@-9.999,8.42 -8.6,8.42 -8.6,12.407 U20.23@-9.999,12.407
  Top Layer w1: DEC/ALT.4@-10.751,0.499 -10,1.252 U20.23@-9.999,8.42
DEC_CS: DEC_CS.1 U20.18 | length 30
  Top Layer w0.2: DEC_CS.1@-18,27 -16.552,27 -15.802,26.25 v2(-12.5,26.25) ; U20.18@-15.211,6.001 -15.212,12.788 v2(-14.5,13.5)
  Mid-Layer 2 w0.2: v2(-14.5,13.5) -14.5,15.999 -12.75,17.749 -12.75,25.999 v2@-12.499,26.25
  Bottom Layer w0.2: -15.224,26.499 -13.5,26.499 -13.251,26.25 v2@-12.499,26.25
DEC_DIR: DEC_DIR.1 U20.41 | length 20.9
  Top Layer w0.2: U20.41@-17.599,18.001 -17.599,17.099 v2@-16.499,15.999 ; DEC_DIR.1@-17,28 -16.79,28 -15.79,27 v2(-13.25,27)
  Mid-Layer 2 w0.2: v2@-16.499,15.999 -13.251,19.25 v2(-13.25,27)
  Bottom Layer w0.2: -15.224,27 v2(-13.25,27)
  other v2: -16.5,16
DEC_ENA: DEC_ENA.1 U20.19 | length 30.1
  Top Layer w0.2: DEC_ENA.1@-17,26 -16.5,25.5 v2(-11.75,25.5) ; U20.19@-14.399,6.001 -14.399,12.601 v2(-13.5,13.5)
  Mid-Layer 2 w0.2: v2(-13.5,13.5) -14,14 -14,15.75 -12.25,17.5 -12.25,25.001 v2(-11.75,25.5)
  Bottom Layer w0.2: -15.224,25.999 -13.749,25.999 -13.251,25.501 v2(-11.75,25.5)
DEC_ENCA: 
DEC_ENCB: 
DEC_ENCX: 
DEC_MA_SENSE: R21.2 R22.2 U20.9 | length 8.8
  Top Layer w0.5: U20.9@-21.998,9.613 -19.613,9.613 v1@-19.499,9.499
  Bottom Layer w0.5: v1@-19.499,9.499 -19.499,10.749 R22.2@-18.501,10.749
  Bottom Layer w0.8: R21.2@-21.998,11.254 -18.501,11.254 R22.2@-18.501,10.749
  other v1: -19.5,9.5
DEC_MB_SENSE: R23.2 R24.2 U20.25 | length 8.8
  Top Layer w0.5: v1@-12.499,9.499 -12.387,9.613 U20.25@-9.999,9.614
  Bottom Layer w0.5: R24.2@-13.5,10.749 -12.499,10.749 v1@-12.499,9.499
  Bottom Layer w0.8: R24.2@-13.5,10.749 -13.5,11.254 R23.2@-10,11.254
  other v1: -12.5,9.5
DEC_STEP: DEC_STEP.1 U20.42 | length 21.6
  Top Layer w0.2: U20.42@-18.386,18.001 -18.387,16.886 v2@-17.5,15.999 ; DEC_STEP.1@-18,29.001 -15.25,29 v2(-14,27.75)
  Mid-Layer 2 w0.2: v2(-17.5,16) -13.75,19.75 -13.75,26.75 -14,27 v2(-14,27.75)
  Bottom Layer w0.2: -15.224,27.5 -14.249,27.5 v2@-14,27.749
F11_2: F11.2 RA/AZ.3 | length 6.5
  Bottom Layer w1: F11.2@17.694,7 17.75,6.944 RA/AZ.3@17.751,0.499
F12_2: F12.2 RA/AZ.2 | length 6.5
  Bottom Layer w1: RA/AZ.2@14.251,0.499 14.25,6.944 F12.2@14.306,7
F21_1: DEC/ALT.3 F21.1 | length 6.5
  Bottom Layer w1: F21.1@-14.305,7 -14.305,0.553 DEC/ALT.3@-14.251,0.499
F22_1: DEC/ALT.2 F22.1 | length 6.5
  Bottom Layer w1: DEC/ALT.2@-17.751,0.499 -17.752,6.944 F22.1@-17.696,7
FOC_2: F32.1 FOCUSER1.2 | length 6.5
  Bottom Layer w1: FOCUSER1.2@-1.75,0.5 -1.75,6.946 F32.1@-1.694,7
FOC_3: F31.1 FOCUSER1.3 | length 6.5
  Bottom Layer w1: F31.1@1.695,7 1.751,6.944 FOCUSER1.3@1.75,0.5
FOC_BMA1: F32.2 U30.2 | length 16
  Top Layer w1: U30.2@-5.999,10.782 -4.5,10.782 v1(-4.5,12.5) ; U30.2@-5.999,14.795 -5.793,15.001 v1(-4.5,15)
  Bottom Layer w1: F32.2@-6.304,7 -7.3,7.996 -7.3,12.501 v1(-4.5,12.5) ; v1(-4.5,12.5) v1(-4.5,15)
FOC_BMA2: FOCUSER1.1 U30.5 | length 15
  Top Layer w0.8: U30.5@-5.999,8.42 -7.401,8.42 -7.401,12.407 U30.5@-5.999,12.407
  Top Layer w1: U30.5@-5.999,8.42 -5.999,1.249 FOCUSER1.1@-5.25,0.5
FOC_BMB1: F31.2 U30.26 | length 15.9
  Top Layer w1: v1(4.5,12.5) 4.499,11 5.781,11 U30.26@6,10.782 ; v1(4.5,15) 5.794,15.001 U30.26@6,14.795
  Bottom Layer w1: v1(4.5,12.5) 7.3,12.501 7.3,7.996 F31.2@6.305,7 ; v1(4.5,12.5) v1(4.5,15)
FOC_BMB2: FOCUSER1.4 U30.23 | length 15
  Top Layer w0.8: U30.23@6,8.42 7.399,8.42 7.399,12.407 U30.23@6,12.407
  Top Layer w1: FOCUSER1.4@5.25,0.5 6,1.247 U30.23@6,8.42
FOC_CS: U30.18 | length 32.9
  Top Layer w0.2: U30.18@0.789,6.001 0.788,12.788 v2(1.5,13.5)
  Mid-Layer 2 w0.2: v2@-13.251,29.499 -12.499,29.499 -12.25,29.25 -11.249,29.25 -5.001,22.999 -5.001,21.501 1.499,15.001 v2(1.5,13.5)
  Bottom Layer w0.2: -15.224,29.499 v2@-13.251,29.499
  other v2: -13.25,29.5
FOC_DIR: U30.41 | length 23.6
  Top Layer w0.2: U30.41@-1.6,18.001 -1.6,17.099 v2@-0.5,15.999
  Mid-Layer 2 w0.2: v2@-12.499,28.75 -11.501,28.75 -5.499,22.75 -5.499,21.249 -0.5,16.251 v2@-0.5,15.999
  Bottom Layer w0.2: -15.224,29.001 -13.5,29.001 -13.251,28.75 v2@-12.499,28.75
  other v2: -0.5,16 -12.5,28.75
FOC_ENA: U30.19 | length 34.3
  Top Layer w0.2: U30.19@1.601,6.001 1.601,12.601 v2(2.5,13.5)
  Mid-Layer 2 w0.2: v2(-14,30.25) -12.499,30.251 -12.001,29.751 -11,29.751 -4.5,23.251 -4.5,21.75 2.5,14.749 v2(2.5,13.5)
  Bottom Layer w0.2: -15.224,30 -14.249,30 v2(-14,30.25)
FOC_MA_SENSE: R31.2 R32.2 U30.9 | length 8.3
  Top Layer w0.5: U30.9@-5.999,9.613 -3.614,9.613 v1@-3.5,9.499
  Bottom Layer w0.5: v1@-3.5,9.499 -3.5,10.749 R32.2@-2.75,10.749
  Bottom Layer w0.8: R31.2@-5.999,11.254 -2.75,11.254 R32.2@-2.75,10.749
  other v1: -3.5,9.5
FOC_MB_SENSE: R33.2 R34.2 U30.25 | length 8.8
  Top Layer w0.5: v1@3.501,9.499 3.615,9.613 U30.25@6,9.614
  Bottom Layer w0.5: R34.2@2.502,10.749 3.501,10.749 v1@3.501,9.499
  Bottom Layer w0.8: R34.2@2.502,10.749 2.502,11.254 R33.2@6,11.253
  other v1: 3.5,9.5
FOC_STEP: U30.42 | length 22.4
  Top Layer w0.2: U30.42@-2.386,18.001 -2.387,16.886 v2@-1.501,15.999
  Mid-Layer 2 w0.2: v2(-11.75,28) -11.501,28.001 -5.999,22.499 -5.999,21 -1.501,16.502 v2@-1.501,15.999
  Bottom Layer w0.2: -15.224,28.501 -13.751,28.501 -13.251,28.001 v2(-11.75,28)
  other v2: -1.5,16
GND: BT1.2 C1.2 C2.1 C3.1 C4.2 C11.1 C12.1 C13.1 C14.2 C15.1 C16.2 C21.1 C22.1 C23.1 C24.2 C25.1 C26.2 C31.1 C32.1 C33.1 C34.2 C35.1 C36.2 C41.1 C42.2 C43.2 C51.1 C52.2 D1.2 D4.2 DC_IN.2 J1.4 J1.SH1 J1.SH2 JP1.2 JP1.3 LED2.2 P1.3 R1.1 R3.1 R12.1 R14.1 R22.1 R24.1 R32.1 R34.1 R71.2 REMOTE1.1 TV60.2 U1.4 U1.5 U1.6 U1.7 U1.8 U10.17 U10.21 U10.39 U10.43 U10.44 U20.17 U20.21 U20.39 U20.43 U20.44 U30.17 U30.21 U30.39 U30.43 U30.44 U50.1 U50.10 U50.12 U70.4 | length 63.9
  Top Layer w0.5: v2(-21,18) U20.44@-19.987,18.001 U20.43@-19.199,18.001 ; C25.1@-18.849,20 -18.3,20.551 v2(-18.3,20.8) -18.3,20.95 C24.2@-18.849,21.501 ; U20.39@-15.999,18.001 -15.999,18.999 C21.1@-15.999,19.649 ; v2(-4.5,18) U30.44@-3.987,18.001 U30.43@-3.199,18.001 ; C35.1@-2.849,20 -2.499,20.35 -2.499,20.751 -2.499,21.15 C34.2@-2.849,21.501 ; U30.39@0,18.001 C31.1@0,19.649 ; U1.4@2.906,42.228 3.135,42.001 v2@4.001,42.001 ; v2(11.5,18) U10.44@12.012,18.001 U10.43@12.8,18.001 ; U50.12@12.187,32.199 13.701,32.199 14.001,32.499 14.001,34 13.6,34.401 U50.10@12.189,34.4 ; C15.1@13.15,20 13.501,20.35 13.501,20.751 13.501,21.15 C14.2@13.15,21.5 ; U10.39@16,18.001 16,18.999 C11.1@16,19.649 ; U50.1@21.812,25.6 21.999,25.412 v2(22,24.5) ; R71.2@21.85,35.999 23,35.999 23.6,35.999 C51.1@23.749,35.849
  Top Layer w1: v1(-25,20) v1(-22.5,20) ; v1@-22.499,20 C23.1@-22.499,21.099 ; C4.2@-21,50.51 v1@-21,52.499 ; v1@-18.999,38.501 C3.1@-18.999,39.4 ; v1@-9.499,20 -9.499,21.099 C33.1@-6.5,21.099 v1(-6.499,20) ; v1(6.5,20) C32.1@6.5,21.099 9.5,21.099 v1(9.5,20) ; 17.999,55.999 R1.1@18.001,53.85 ; C1.2@21.001,43.401 21.1,43.5 v1(25,43.5) ; v2(22,24.5) 24.5,24.5 v1(25,24) ; P1.3@22.08,39 24,39 v1(25,40) ; v1(22.5,20) C12.1@22.5,21.099 ; v1(22.5,20) v1(25,20)
  Bottom Layer w1: v1(19,55.999) v1(20.012,56) ; v1@20.011,55.999 DC_IN.2@21.7,56 21.7,55.999 v1@24.999,55.999
  other v1: -25,-2 -20,-2 -16,-2 -12,-2 -8,-2 -4,-2 0,-2 4,-2 8,-2 12,-2 16,-2 20,-2 25,-2 -25,4 -20,4 -12,4 -4,4 4,4 12,4 20,4 25,4 -8,6 8,6 -25,8 25,8 -25,12 25,12 -25,16 25,16 -9.5,20 -25,24 -21,24 14,24 -25,28 -8,28 25,28 -4,30 -25,32 25,32 -12,34 -8,34 -6,34 -18,34.5 -25,36 -20,36 16,36 25,36 -19,38.5 -25,40 -25,44 -25,48 -20,48 -8,48 -6,48 4,48 25,48 -18,50 -2,50 0,50 2,50 -25,52 -18,52 -2,52 25,52 -21,52.5 16,54 -25,56 -20,56 4,56 6,56 23.5,56 25,56
  other v2: -16,19 0,19 16,19 -2.5,20.75 13.5,20.75 14,34 23,36 4,42
L51_1: L51.1 U50.14 | length 3.2
  Top Layer w0.5: L51.1@10.501,31.8 10.501,30.5 11.001,30 U50.14@12.189,30
LED2_1: LED2.1 | length 26.6
  Top Layer w0.2: v3(-3.5,55) -3.35,55.148 LED2.1@-2.001,55.148
  Mid-Layer 2 w0.2: v3(-10.5,46.25) -10.5,49.001 -4.5,55.001 v3(-3.5,55)
  Bottom Layer w0.2: -15.224,40 -16.25,40 -16.499,40.251 -16.499,44 -15.999,44.5 -11,44.5 -10.5,45.001 v3(-10.5,46.25)
LED3_2: LED1.2 R3.2 | length 2
  Top Layer w0.2: R3.2@0,56.849 LED1.2@1.999,56.85
PPS_GPS: U50.4 | length 41
  Top Layer w0.25: v2@17.501,30.5 18.751,30.5 20.351,28.9 U50.4@21.812,28.9
  Mid-Layer 2 w0.2: v2(-12,37.25) -11.75,37 -2.999,37 3.749,30.251 16.5,30.251 16.749,30.5 v2@17.501,30.5
  Bottom Layer w0.2: -15.224,38.001 -13.751,38.001 -12.999,37.251 v2(-12,37.25)
  other v2: 17.5,30.5
R31_1: R31.1 U30.12 | length 5
  Top Layer w0.5: v2(-4,7.5) -4,6.014 U30.12@-3.987,6.001
  Bottom Layer w0.5: R31.1@-5.999,9.746 -5.247,9.746 -4,8.501 v2(-4,7.5)
R33_1: R33.1 U30.22 | length 5
  Top Layer w0.5: U30.22@3.988,6.001 4.001,6.012 v2@4.001,7.5
  Bottom Layer w0.5: v2@4.001,7.5 4.001,8.501 5.248,9.746 R33.1@6,9.746
  other v2: 4,7.5
R41_2: R41.2 | length 9.8
  Bottom Layer w0.2: -22.776,38.249 -21.351,38.249 -19.499,40.101 -19.499,44.65 R41.2@-20.35,45.5
R42_2: R42.2 | length 11.2
  Bottom Layer w0.2: -22.776,37.749 -21.249,37.749 -18.999,40 -18.999,43.5 -17,45.501 R42.2@-16.85,45.5
R51_2: JP1.1 R51.2 | length 4.1
  Top Layer w0.5: R51.2@8.5,34.753 v2@8.499,35.999
  Bottom Layer w0.5: v2@8.499,35.999 9,35.999 JP1.1@9,38.347
  other v2: 8.5,36
R52_1: ANT1.1 R52.1 | length 10.6
  Top Layer w0.5: v2@7.001,32.001 7.255,31.747 R52.1@8.5,31.747
  Bottom Layer w0.5: ANT1.1@-2,32 v2(7,32)
R52_2: L51.2 R51.1 R52.2 U50.11 | length 3.7
  Top Layer w0.5: R51.1@8.499,33.246 10.453,33.246 10.501,33.2 10.6,33.299 U50.11@12.187,33.299
RA_BMA1: F12.1 U10.2 | length 16
  Top Layer w1: U10.2@10,10.782 11.499,10.782 v1(11.5,12.5) ; U10.2@10,14.795 10.206,15.001 v1(11.5,15)
  Bottom Layer w1: F12.1@9.696,7 8.7,7.996 8.7,12.501 v1(11.5,12.5) ; v1(11.5,12.5) v1(11.5,15)
RA_BMA2: RA/AZ.1 U10.5 | length 15
  Top Layer w0.8: U10.5@10,8.42 8.601,8.42 8.601,12.407 U10.5@10,12.407
  Top Layer w1: U10.5@10,8.42 10,1.249 RA/AZ.1@10.751,0.499
RA_BMB1: F11.1 U10.26 | length 16.3
  Top Layer w1: v1@20.501,12.501 20.501,10.782 U10.26@22,10.782 ; v1@20.501,15.001 21.794,15.001 U10.26@22,14.795
  Bottom Layer w1: v1(20.5,12.5) v1(20.5,15) ; v1@20.501,12.501 23.501,12.501 23.501,8.196 F11.1@22.304,7
RA_BMB2: RA/AZ.4 U10.23 | length 15.2
  Top Layer w1: RA/AZ.4@21.251,0.499 21.999,1.249 U10.23@22,8.42 23.501,8.42 23.501,12.407 U10.23@22,12.407
RA_CS: RA_CS.1 U10.18 | length 53
  Top Layer w0.2: RA_CS.1@-17,32.001 v2(-13.25,32) ; U10.18@16.788,6.001 16.787,12.788 v2@17.501,13.5
  Mid-Layer 2 w0.2: v2(-13.25,32) -13.002,32.25 -9.499,32.25 -1.75,24.5 7.999,24.5 17.501,14.998 v2@17.501,13.5
  Bottom Layer w0.2: -15.224,32.001 v2(-13.25,32)
  other v2: 17.5,13.5
RA_DIR: RA_DIR.1 U10.41 | length 46
  Top Layer w0.2: RA_DIR.1@-18,31.001 -16.7,31 -16.197,31.503 -13.515,31.503 -13.261,31.249 v2@-12.499,31.249 ; U10.41@14.4,18.001 14.4,17.101 v2@15.5,15.999
  Mid-Layer 2 w0.2: v2@-12.499,31.249 -12.001,31.75 -9.751,31.75 -2.001,24 7.75,24 15.5,16.251 v2@15.5,15.999
  Bottom Layer w0.2: -15.224,31.501 -13.5,31.501 -13.251,31.249 v2@-12.499,31.249
  other v2: 15.5,16 -12.5,31.25
RA_ENA: RA_ENA.1 U10.19 | length 54.5
  Top Layer w0.2: RA_ENA.1@-18,33.001 -16.536,33 -16.286,32.75 v2(-14,32.75) ; U10.19@17.6,6.001 17.6,12.601 v2(18.5,13.5)
  Mid-Layer 2 w0.2: v2(-14,32.75) -9.25,32.75 -1.501,25.001 8.248,25.001 18.499,14.749 v2(18.5,13.5)
  Bottom Layer w0.2: -15.224,32.499 -14.249,32.499 v2(-14,32.75)
RA_ENCA: 
RA_ENCB: 
RA_ENCX: 
RA_MA_SENSE: R11.2 R12.2 U10.9 | length 8.8
  Top Layer w0.5: U10.9@10,9.613 12.385,9.613 v1@12.5,9.499
  Bottom Layer w0.5: v1@12.5,9.499 12.5,10.749 R12.2@13.501,10.749
  Bottom Layer w0.8: R11.2@10,11.254 13.501,11.254 R12.2@13.501,10.749
  other v1: 12.5,9.5
RA_MB_SENSE: R13.2 R14.2 U10.25 | length 8.8
  Top Layer w0.5: v1@19.5,9.499 19.614,9.613 U10.25@22,9.614
  Bottom Layer w0.5: R14.2@18.499,10.749 19.5,10.749 v1@19.5,9.499
  Bottom Layer w0.8: R14.2@18.499,10.749 18.499,11.254 R13.2@22,11.253
  other v1: 19.5,9.5